# Altium PCB SDvp.PcbDoc
Units mil, origin at the board's own origin, x right, y up, seen from the top; angles counter-clockwise.
Board outline 3149.61 x 3937.01 mil, 2 copper layers (Top Layer, Bottom Layer); 108 components, 81 nets, 431 pads, 388 vias.
Unrouted connection lines stored in the file: 90.
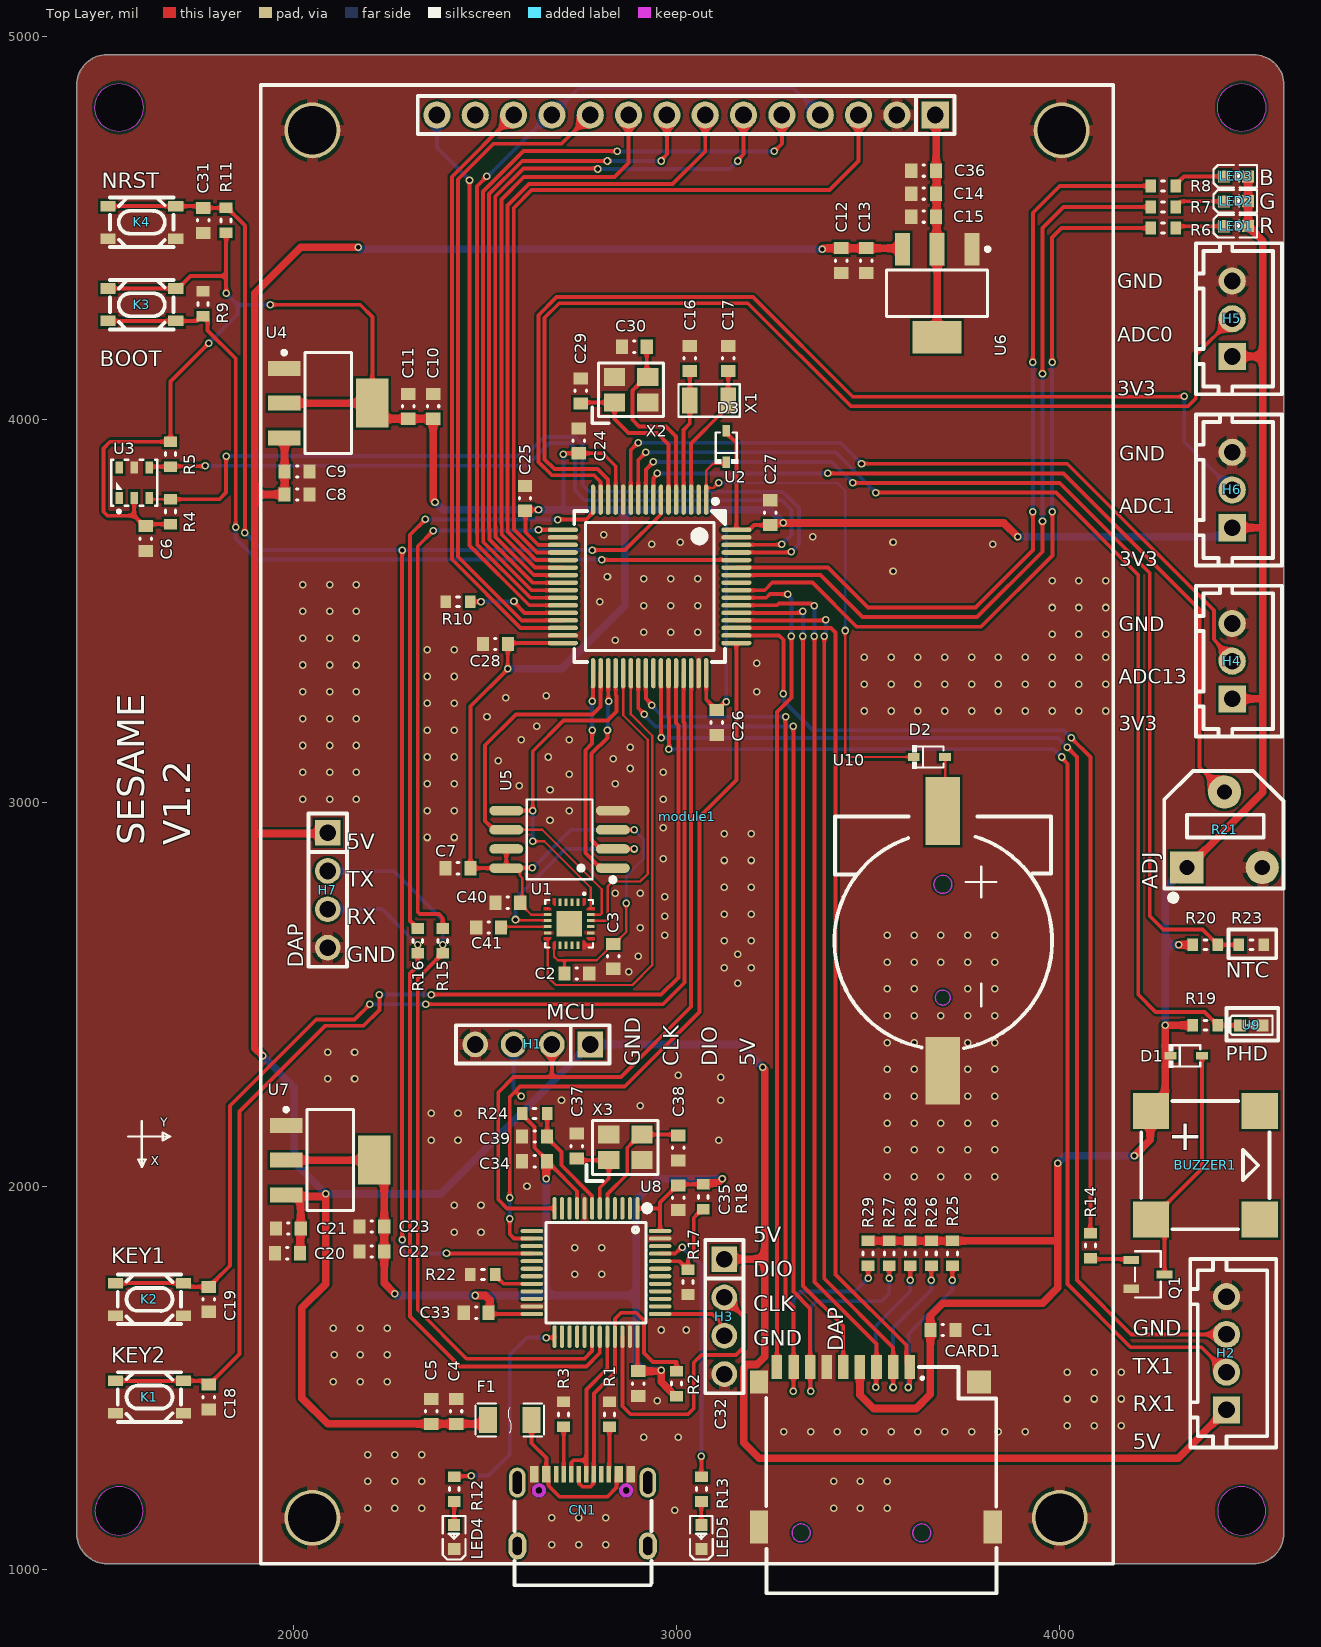
[diagram p0: Top Layer view]
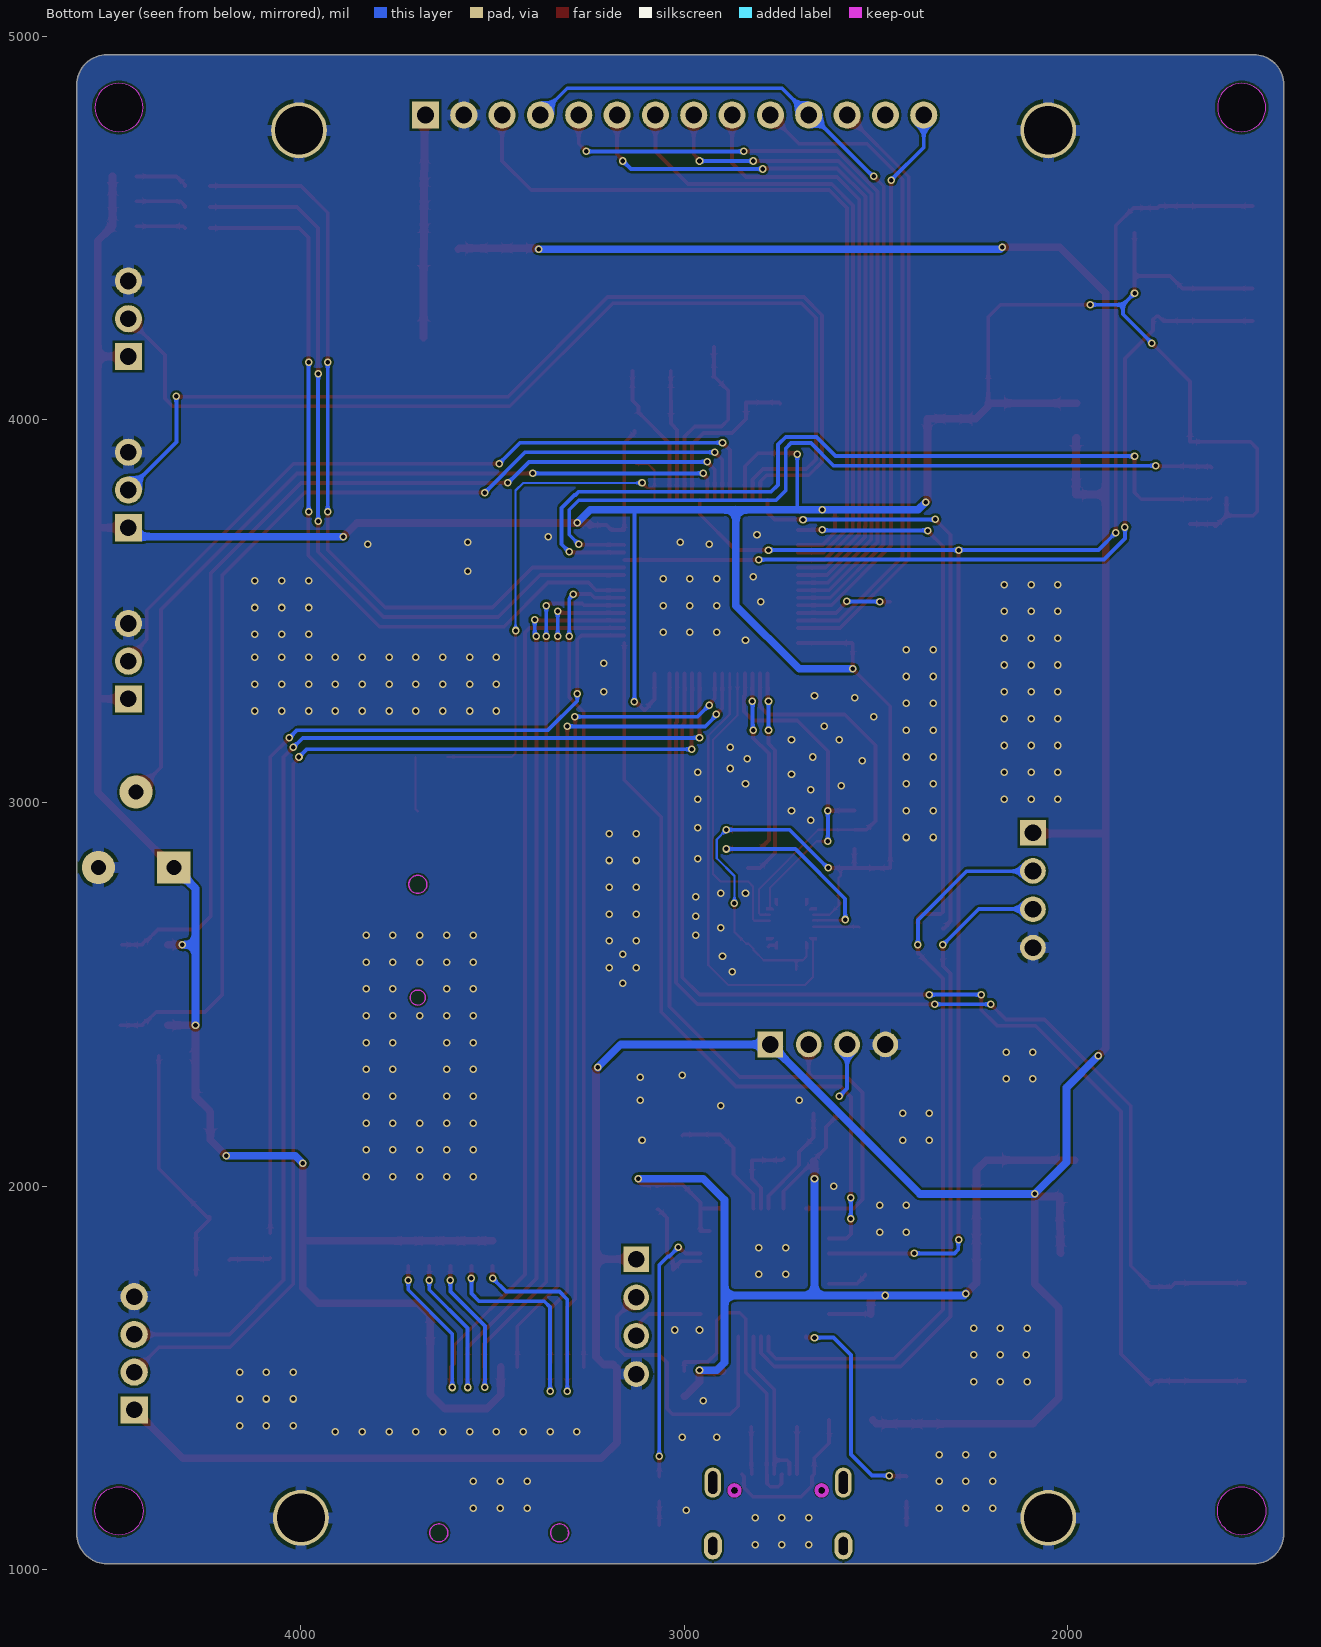
[diagram p1: Bottom Layer view, seen from below]

## Layer stack, top to bottom
Top Solder: solder mask 0.4, Solder Resist, Dk 3.5
Top Layer: signal copper 1.4
Dielectric 1: dielectric 12.6, FR-4, Dk 4.8
Bottom Layer: signal copper 1.4
Bottom Solder: solder mask 0.4, Solder Resist, Dk 3.5

## Board outline
1435.25,1093.99 ccw(c1513.99,1093.99) 1513.99,1015.25 4506.12,1015.25 ccw(c4506.12,1093.99) 4584.86,1093.99 4584.86,4873.52 ccw(c4506.12,4873.52) 4506.12,4952.26 1513.99,4952.26 ccw(c1513.99,4873.52) 1435.25,4873.52
cut-out: 4474.62,4751.47 cw(c4474.62,4814.46) 4411.63,4814.46 cw(c4474.62,4814.46) 4474.62,4877.45 cw(c4474.62,4814.46) 4537.61,4814.46 cw(c4474.62,4814.46)
cut-out: 4411.63,1153.05 ccw(c4474.62,1153.05) 4474.62,1090.05 ccw(c4474.62,1153.05) 4537.61,1153.05 ccw(c4474.62,1153.05) 4474.62,1216.04 ccw(c4474.62,1153.05)
cut-out: 1482.49,1153.05 ccw(c1545.49,1153.05) 1545.49,1090.05 ccw(c1545.49,1153.05) 1608.48,1153.05 ccw(c1545.49,1153.05) 1545.49,1216.04 ccw(c1545.49,1153.05)
cut-out: 1545.49,4751.47 cw(c1545.49,4814.46) 1482.49,4814.46 cw(c1545.49,4814.46) 1545.49,4877.45 cw(c1545.49,4814.46) 1608.48,4814.46 cw(c1545.49,4814.46)

## Design rules (kind name [scope] priority, off if disabled: settings)
Clearance [All] p1: gap=6 ignorepadtopadclearanceinfootprint=FALSE
HoleSize [All] p1: absolutevalues=TRUE maxlimit=1000 minlimit=1 maxpercent=80.000 minpercent=20.000
MinimumSolderMaskSliver [All] p1: minsoldermaskwidth=0.5
PlaneConnect [All] p1: planeconnectstyle=Direct reliefexpansion=20 reliefentries=4 reliefconductorwidth=15 reliefairgap=10
PolygonConnect [All] p1: thpad.connectstyle=Relief thpad.reliefconductorwidth=30 thpad.reliefentries=4 thpad.polygonreliefangle="90 Angle" thpad.airgapwidth=10 smdpad.connectstyle=Direct smdpad.reliefconductorwidth=30 smdpad.reliefentries=4 smdpad.polygonreliefangle="90 Angle" smdpad.airgapwidth=10 via.connectstyle=Direct via.reliefconductorwidth=30 via.reliefentries=4 via.polygonreliefangle="90 Angle" via.airgapwidth=10
RoutingVias [All] p1: holewidth=11.81 width=19.68 viastyle="Through Hole" minholewidth=11.81 minwidth=19.68 maxholewidth=1181.1 maxwidth=1968.5
SilkToSilkClearance [All] p1: silktosilkclearance=0
SilkToSolderMaskClearance [IsPad] p1: minsilkscreentomaskgap=0 clearancetoexposedcopper=TRUE
SolderMaskExpansion [All] p1: expansion=4 istentingtop=FALSE
Width [All] p1: maxlimit=1000 minlimit=6 preferedwidth=10
25 further rules are at their usual default settings.

## Components (designator, comment, footprint, x,y, rotation, side; value= is the part's Value field where it differs from the comment)
BUZZER1 "PassiveBuzzer" BUZ-SMD_8530 4380,2055 r270 top
C1 "100nf" CAP0603 3695,1625 r180 top
C2 "100nf" CAP0603 2740,2555 r0 top
C3 "10uf" CAP0603 2835,2600 r270 top
C4 "100nf" CAP0603 2425,1412.52 r270 top
C5 "10uf" CAP0603 2360,1412.48 r270 top
C6 "100nf" CAP0603 1615,3690 r270 top
C7 "100nf" CAP0603 2430,2830 r180 top
C8 "10uf" CAP0603 2010,3805 r180 top
C9 "100nf" CAP0603 2010,3865 r180 top
C10 "10uf" CAP0603 2365,4035 r270 top
C11 "100nf" CAP0603 2300,4035 r270 top
C12 "10uf" CAP0603 3430,4415 r90 top
C13 "100nf" CAP0603 3495,4415 r90 top
C14 "10uf" CAP0603 3645,4590 r0 top
C15 "100nf" CAP0603 3645,4530 r0 top
C16 "22pf" CAP0603 3035,4160 r270 top
C17 "22pf" CAP0603 3135,4160 r270 top
C18 "100nf" CAP0603 1780,1450 r270 top
C19 "100nf" CAP0603 1780,1705 r270 top
C20 "10uf" CAP0603 1985,1825 r0 top
C21 "100nf" CAP0603 1987.23,1889.74 r0 top
C22 "10uf" CAP0603 2205,1830 r0 top
C23 "100nf" CAP0603 2205,1895 r0 top
C24 "100nf" CAP0603 2745,3945 r270 top
C25 "100nf" CAP0603 2605,3795 r270 top
C26 "100nf" CAP0603 3105,3210 r90 top
C27 "100nf" CAP0603 3245,3757.48 r270 top
C28 "100nf" CAP0603 2527.52,3415 r0 top
C29 "22pf" CAP0603 2750,4075 r90 top
C30 "22pf" CAP0603 2890,4190 r0 top
C31 "100nf" CAP0603 1765,4520 r270 top
C32 "100nf" CAP0603 2900,1485 r90 top
C33 "100nf" CAP0603 2477.52,1670 r0 top
C34 "100nf" CAP0603 2630,2065 r0 top
C35 "100nf" CAP0603 3005,1970 r90 top
C36 "10uf" CAP0603 3645,4650 r0 top
C37 "22pf" CAP0603 2740,2105 r90 top
C38 "22pf" CAP0603 3005,2100 r90 top
C39 "100nf" CAP0603 2630,2130 r180 top
C40 "100nf" CAP0603 2560,2740 r180 top
C41 "100nf" CAP0603 2510,2675 r180 top
CARD1 "TFCard" TF-SMD 3520,1320 r0 top
CN1 "TypeC-16pin" USB-C-SMD_16Pin 2755,1155 r0 top
D1 "SchotkyDiode" SOD-323 4330,2340 r180 top
D2 "SchotkyDiode" SOD-323 3660,3120 r180 top
D3 "SchotkyDiode" SOD-323 3130,3930 r270 top
F1 "16V 1.5A" FUSE1206 2565,1390 r180 top
H1 "Head_4Pin" 2.54排针_4PIN 2625,2370 r180 top
H2 "Head_4Pin" XH2.54_4Pin 4435,1564.21 r90 top
H3 "Head_4Pin" 2.54排针_4PIN 3125,1660 r270 top
H4 "Head_3Pin" XH2.54_3Pin 4450,3370 r90 top
H5 "Head_3Pin" XH2.54_3Pin 4450,4263.43 r90 top
H6 "Head_3Pin" XH2.54_3Pin 4450,3816.71 r90 top
H7 "Head_4Pin" 2.54排针_4PIN 2090,2772.64 r270 top
K1 "SW" SW-SMD_3425 1625,1450 r180 top
K2 "SW" SW-SMD_3425 1625,1705 r180 top
K3 "SW" SW-SMD_3425 1605,4300 r0 top
K4 "SW" SW-SMD_3425 1605,4515 r0 top
LED1 "LED_R" LED0603 4460,4505 r0 top
LED2 "LED_G" LED0603 4460,4570 r0 top
LED3 "LED_B" LED0603 4460,4635 r0 top
LED4 "LED" LED0603 2420,1085 r90 top
LED5 "LED" LED0603 3065,1085 r90 top
module1 "LCD_3.5Inch" LCD_3.5Inch 3675,4795 r0 top locked
Q1 "NPN_SOT-23" SOT-23-3 4230,1770 r180 top
R1 "5.1k" RES0603 2825,1405 r90 top
R2 "1.5k" RES0603 3000,1485 r90 top
R3 "5.1k" RES0603 2705,1405 r90 top
R4 "10k" RES0603 1680,3760 r270 top
R5 "10k" RES0603 1680,3910 r90 top
R6 "1k" RES0603 4270,4500 r0 top
R7 "1.5k" RES0603 4270,4555 r180 top
R8 "1k" RES0603 4270,4610 r180 top
R9 "10k" RES0603 1765,4302.52 r90 top
R10 "10k" RES0603 2430,3525 r180 top
R11 "10k" RES0603 1825,4520 r90 top
R12 "2.7k" RES0603 2420,1210 r90 top
R13 "2.7k" RES0603 3065,1210 r90 top
R14 "470R" RES0603 4080,1845 r270 top
R15 "100R" RES0603 2390,2640 r90 top
R16 "100R" RES0603 2325,2640 r90 top
R17 "10k" RES0603 3030,1750 r90 top
R18 "NC" RES0603 3070,1972.48 r90 top
R19 "100k" RES0603 4380,2420 r180 top
R20 "100k" RES0603 4380,2630 r180 top
R21 "10k" RES-ADJ-BuleWhite 4430,2930 r0 top
R22 "10k" RES0603 2495,1770 r0 top
R23 "100k" RES0603 4500,2630 r180 top
R24 "10k" RES0603 2630,2190 r0 top
R25 "47k" RES0603 3720,1825 r270 top
R26 "47k" RES0603 3665,1825 r270 top
R27 "47k" RES0603 3555,1825 r270 top
R28 "47k" RES0603 3610,1825 r270 top
R29 "47k" RES0603 3500,1825 r270 top
U1 "MPU6500" QFN-24 2720,2685 r180 top
U2 "STM32F103RCT6" LQFP-64 2930,3565 r180 top
U3 "AHT20" AHT20 1585,3835.63 r270 top
U4 "AMS1117-3.3" SOT223 2091.48,4043.27 r0 top
U5 "W25Q64JVSSIQ" SOIC-8 2695,2905 r90 top
U6 "AMS1117-3.3" SOT223 3680,4329.84 r270 top
U7 "AMS1117-3.3" SOT223 2096.48,2068.27 r0 top
U8 "STM32F103C8T6" LQFP-48 2790,1775 r180 top
U9 "Photodiode" Photodiode0603 4500,2420 r180 top
U10 "CR-1220" BAT-SMD_CR1220 3695,2640 r270 top
X1 "32.768kHz" XTAL_3215 3085,4050 r0 top
X2 "8MHz" XTAL_3225 2838.39,4045 r0 top
X3 "8MHz" XTAL_3225 2823.39,2068.07 r0 top

## Footprints (in the part's own frame and the unit in brackets; to place one, negate y for a bottom-side part, rotate by r counter-clockwise, add the part's x,y. Pads: shape width x height; smd on the part's side, far side on the other; paste and mask are expansions set on the pad)
2.54排针_4PIN [mm]
  rect 1.7x1.7 hole 1.1 paste+0.051: 1(-3.81,0)
  round 1.7 hole 1.1 paste+0.051: 2(-1.27,0) 3(1.27,0) 4(3.81,0)
  silkscreen extent -5.08,-1.27 5.08,1.27, body extent -5.08,-1.33 5.08,1.33, height 8.54
AHT20 [mm]
  rect 0.8x0.5 smd paste+0 mask+0.05: 1(1,-1) 2(1,0) 3(1,1) 4(-1,1) 5(-1,0) 6(-1,-1)
  silkscreen extent -1.52,-1.52 2,1.52, body extent -1.5,-1.53 1.5,1.47, height 0.81
BAT-SMD_CR1220 [mm]
  rect 4.5x2.3 smd paste+0.051: 1(-8.6,0) 2(8.6,0)
  Keep-Out Layer circle w0.003: c3.75,0 r0.5
  Keep-Out Layer circle w0.003: c-3.75,0 r0.6
  Keep-Out Layer region: 4.25,0 4.201,-0.217 4.062,-0.391 3.861,-0.487 3.639,-0.487 3.438,-0.391 3.3,-0.217 3.25,0 3.25,0 3.3,0.217 3.438,0.391 3.639,0.487 3.861,0.487 4.062,0.391 4.201,0.217 4.25,0
  Keep-Out Layer region: 4.25,0 4.201,-0.217 4.062,-0.391 3.861,-0.487 3.639,-0.487 3.438,-0.391 3.3,-0.217 3.25,0 3.25,0 3.3,0.217 3.438,0.391 3.639,0.487 3.861,0.487 4.062,0.391 4.201,0.217 4.25,0
  Keep-Out Layer region: -3.15,0 -3.209,-0.26 -3.376,-0.469 -3.617,-0.585 -3.884,-0.585 -4.124,-0.469 -4.291,-0.26 -4.35,0 -4.35,0 -4.291,0.26 -4.124,0.469 -3.884,0.585 -3.617,0.585 -3.376,0.469 -3.209,0.26 -3.15,0
  Keep-Out Layer region: -3.15,0 -3.209,-0.26 -3.376,-0.469 -3.617,-0.585 -3.884,-0.585 -4.124,-0.469 -4.291,-0.26 -4.35,0 -4.35,0 -4.291,0.26 -4.124,0.469 -3.884,0.585 -3.617,0.585 -3.376,0.469 -3.209,0.26 -3.15,0
  silkscreen extent -8.24,-7.19 7.11,7.24, body extent -9.14,-7.45 9.46,7.45, height 4.1
BUZ-SMD_8530 [mil]
  rect 94.49x94.49 smd paste+2: 1(-141.72,-141.73) 2(141.72,-141.73) 3(141.71,141.72) 4(-141.72,141.73)
  silkscreen extent -167,-167 167,167, body extent -171,-171 171,171, height 119
CAP0603 [mm] "Chip Capacitor, 2-Leads, Body 1.60x0.80mm, IPC Medium Density"
  rect 0.8x0.95 smd: 1(-0.825,0) 2(0.825,0)
  silkscreen extent -0.05,-0.38 0.05,0.38, body extent -0.8,-0.4 0.8,0.4, height 0.8
FUSE1206 [mil] "Chip Resistor, 2-Leads, Body 3.10x1.55mm, IPC Medium Density"
  rect 46.85x68.03 smd paste+2: 1(-56.78,0) 2(57,0)
  silkscreen extent -89,-43 89,43, body extent -63,-33 63,33, height 24
LCD_3.5Inch [mm]
  rect 1.8x1.8 hole 1.1 paste+0.051: 1(0,0)
  round 3.7 hole 3.2: 2(-41.275,-92.964) 2(-41.275,-1.016) 2(8.255,-92.964) 2(8.382,-1.016)
  round 1.8 hole 1.1 paste+0.051: 2(-2.54,0) 3(-5.08,0) 4(-7.62,0) 5(-10.16,0) 6(-12.7,0) 7(-15.24,0) 8(-17.78,0) 9(-20.32,0) 10(-22.86,0) 11(-25.4,0) 12(-27.94,0) 13(-30.48,0) 14(-33.02,0)
  silkscreen extent -44.7,-96.01 11.8,1.99, body extent -44.75,-95.99 11.75,2.01, height 15.4
LED0603 [mm]
  rect 0.8x0.8 smd: 1(-0.8,-0.003) 2(0.8,0.003)
  silkscreen extent -1.49,-0.75 1.39,0.76, body extent -0.81,-0.41 0.81,0.41, height 0.56
LQFP-48 [mm]
  oval 0.27x1.5 smd paste+0 mask+0.05: 1(-2.75,-4.25) 2(-2.25,-4.25) 3(-1.75,-4.25) 4(-1.25,-4.25) 5(-0.75,-4.25) 6(-0.25,-4.25) 7(0.25,-4.25) 8(0.75,-4.25) 9(1.25,-4.25) 10(1.75,-4.25) 11(2.25,-4.25) 12(2.75,-4.25) 25(2.75,4.25) 26(2.25,4.25) 27(1.75,4.25) 28(1.25,4.25) 29(0.75,4.25) 30(0.25,4.25) 31(-0.25,4.25) 32(-0.75,4.25) 33(-1.25,4.25) 34(-1.75,4.25) 35(-2.25,4.25) 36(-2.75,4.25)
  oval 1.5x0.27 smd paste+0 mask+0.05: 13(4.25,-2.75) 14(4.25,-2.25) 15(4.25,-1.75) 16(4.25,-1.25) 17(4.25,-0.75) 18(4.25,-0.25) 19(4.25,0.25) 20(4.25,0.75) 21(4.25,1.25) 22(4.25,1.75) 23(4.25,2.25) 24(4.25,2.75) 37(-4.25,2.75) 38(-4.25,2.25) 39(-4.25,1.75) 40(-4.25,1.25) 41(-4.25,0.75) 42(-4.25,0.25) 43(-4.25,-0.25) 44(-4.25,-0.75) 45(-4.25,-1.25) 46(-4.25,-1.75) 47(-4.25,-2.25) 48(-4.25,-2.75)
  silkscreen extent -3.59,-4.46 3.3,3.34, body extent -4.5,-4.5 4.5,4.5, height 1.45
LQFP-64 [mm]
  oval 0.3x2 smd paste+0.051: 1(-3.75,-5.75) 2(-3.25,-5.75) 3(-2.75,-5.75) 4(-2.25,-5.75) 5(-1.75,-5.75) 6(-1.25,-5.75) 7(-0.75,-5.75) 8(-0.25,-5.75) 9(0.25,-5.75) 10(0.75,-5.75) 11(1.25,-5.75) 12(1.75,-5.75) 13(2.25,-5.75) 14(2.75,-5.75) 15(3.25,-5.75) 16(3.75,-5.75) 33(3.75,5.75) 34(3.25,5.75) 35(2.75,5.75) 36(2.25,5.75) 37(1.75,5.75) 38(1.25,5.75) 39(0.75,5.75) 40(0.25,5.75) 41(-0.25,5.75) 42(-0.75,5.75) 43(-1.25,5.75) 44(-1.75,5.75) 45(-2.25,5.75) 46(-2.75,5.75) 47(-3.25,5.75) 48(-3.75,5.75)
  oval 2x0.3 smd paste+0.051: 17(5.75,-3.75) 18(5.75,-3.25) 19(5.75,-2.75) 20(5.75,-2.25) 21(5.75,-1.75) 22(5.75,-1.25) 23(5.75,-0.75) 24(5.75,-0.25) 25(5.75,0.25) 26(5.75,0.75) 27(5.75,1.25) 28(5.75,1.75) 29(5.75,2.25) 30(5.75,2.75) 31(5.75,3.25) 32(5.75,3.75) 49(-5.75,3.75) 50(-5.75,3.25) 51(-5.75,2.75) 52(-5.75,2.25) 53(-5.75,1.75) 54(-5.75,1.25) 55(-5.75,0.75) 56(-5.75,0.25) 57(-5.75,-0.25) 58(-5.75,-0.75) 59(-5.75,-1.25) 60(-5.75,-1.75) 61(-5.75,-2.25) 62(-5.75,-2.75) 63(-5.75,-3.25) 64(-5.75,-3.75)
  silkscreen extent -5,-5.79 5,5, body extent -5.99,-5.99 6.01,6.01, height 1.45
Photodiode0603 [mm]
  rect 0.8x0.8 smd paste+0 mask+0.05: 1(-0.75,0) 2(0.75,0)
  silkscreen extent -1.4,-0.64 1.52,0.64, body extent -0.8,-0.4 0.8,0.4, height 0.8
QFN-24 [mm]
  round 0.04 smd: 1(-1,-1.427) 6(1,-1.427) 7(1.427,-1) 12(1.427,1) 13(1,1.427) 18(-1,1.427) 19(-1.427,1) 24(-1.427,-1)
  rect 0.2x0.505 smd paste-100 mask+0.051: 2(-0.6,-1.427) 3(-0.2,-1.427) 4(0.2,-1.427) 5(0.6,-1.427) 14(0.6,1.427) 15(0.2,1.427) 16(-0.2,1.427) 17(-0.6,1.427)
  rect 0.505x0.2 smd paste-100 mask+0.051: 8(1.427,-0.6) 9(1.427,-0.2) 10(1.427,0.2) 11(1.427,0.6) 20(-1.427,0.6) 21(-1.427,0.2) 22(-1.427,-0.2) 23(-1.427,-0.6)
  rect 1.7x1.7 smd paste-100 mask+0.051: 25(0,0)
  Top Layer region: -1.68,1.1 -1.274,1.1 -1.174,1 -1.175,0.9 -1.68,0.9 -1.68,1.1
  Top Layer region: 1.1,-1.68 0.9,-1.68 0.9,-1.175 1,-1.175 1.1,-1.275 1.1,-1.68
  Top Layer region: -1.1,-1.68 -0.9,-1.68 -0.9,-1.175 -1,-1.174 -1.1,-1.275 -1.1,-1.68
  Top Layer region: 1.1,1.68 0.9,1.68 0.9,1.175 1,1.174 1.1,1.274 1.1,1.68
  Top Layer region: 1.68,1.1 1.274,1.1 1.174,1 1.175,0.9 1.68,0.9 1.68,1.1
  Top Layer region: 1.68,-1.1 1.275,-1.1 1.175,-1 1.175,-0.9 1.68,-0.9 1.68,-1.1
  Top Layer region: -1.68,-1.1 -1.274,-1.1 -1.174,-1 -1.175,-0.9 -1.68,-0.9 -1.68,-1.1
  Top Layer region: -1.1,1.68 -0.9,1.68 -0.9,1.175 -1,1.174 -1.1,1.274 -1.1,1.68
  silkscreen extent -1.58,-2.05 1.58,1.58, body extent -1.5,-1.5 1.5,1.5, height 0.9
RES0603 [mm] "Chip Resistor, 2-Leads, Body 1.60x0.80mm, IPC Medium Density"
  rect 0.7x0.85 smd: 1(-0.825,0) 2(0.825,0)
  silkscreen extent -0.1,-0.33 0.1,0.33, body extent -0.8,-0.4 0.8,0.4, height 0.45
RES-ADJ-BuleWhite [mm]
  rect 2.2x2.1 hole 1 paste+0 mask+0.05: 1(-2.5,-2.5)
  round 2.2 hole 1 paste+0 mask+0.05: 2(0,2.5) 3(2.5,-2.5)
  silkscreen extent -4,-4.7 3.9,3.9, body extent -3.25,-3.7 3.25,3.5, height 7.7
SOD-323 [mm]
  rect 0.78x0.5 smd paste+0.051: 1(-1.04,0) 2(1.04,0)
  silkscreen extent -0.93,-0.78 1.15,0.78, body extent -1.25,-0.62 1.25,0.63, height 0.95
SOIC-8 [mm]
  oval 0.63x2.25 smd paste+0.051: 1(-1.905,-3.53) 2(-0.635,-3.53) 3(0.635,-3.53) 4(1.905,-3.53) 5(1.905,3.53) 6(0.635,3.53) 7(-0.635,3.53) 8(-1.905,3.53)
  silkscreen extent -2.82,-3.68 2.64,2.18, body extent -2.63,-3.89 2.67,4.01, height 2.07
SOT223 [mm]
  rect 2.15x1 smd: 1(-2.925,2.3) 2(-2.925,0) 3(-2.925,-2.3)
  rect 2.15x3.25 smd: 2(2.925,0)
  silkscreen extent -3.05,-3.35 1.55,3.47, body extent -3.55,-3.25 3.56,3.25, height 1.75
SOT-23-3 [mil]
  rect 40.85x20.95 smd paste+2: 1(43.36,-37.4) 2(43.36,37.4) 3(-43.36,0)
  silkscreen extent -34,-60 34,60, body extent -55,-57 55,57, height 43
SW-SMD_3425 [mm]
  rect 1x0.7 smd: 1(-2.25,1.075) 1(2.25,1.075) 2(-2.25,-1.075) 2(2.25,-1.075)
  silkscreen extent -2.1,-1.65 2.1,1.65, body extent -2.6,-1.62 2.6,1.63, height 2.5
TF-SMD [mm]
  rect 0.7x1.6 smd paste+0.051: 1(2.25,5.3) 2(1.15,5.3) 3(0.05,5.3) 4(-1.05,5.3) 5(-2.15,5.3) 6(-3.25,5.3) 7(-4.35,5.3) 8(-5.45,5.3) CD(-6.55,5.3)
  rect 1.2x1.5 smd paste+0.051: 10(-7.75,4.3)
  rect 1.2x2.2 smd paste+0.051: 11(-7.75,-5.3) 12(7.75,-5.3)
  rect 1.6x1.5 smd paste+0.051: 13(6.85,4.3)
  Keep-Out Layer circle w0.003: c-4.95,-5.7 r0.6
  Keep-Out Layer circle w0.003: c3.05,-5.7 r0.6
  Keep-Out Layer region: -4.35,-5.7 -4.409,-5.96 -4.576,-6.169 -4.816,-6.285 -5.083,-6.285 -5.324,-6.169 -5.491,-5.96 -5.55,-5.7 -5.55,-5.7 -5.491,-5.44 -5.324,-5.231 -5.083,-5.115 -4.816,-5.115 -4.576,-5.231 -4.409,-5.44 -4.35,-5.7
  Keep-Out Layer region: -4.35,-5.7 -4.409,-5.96 -4.576,-6.169 -4.816,-6.285 -5.083,-6.285 -5.324,-6.169 -5.491,-5.96 -5.55,-5.7 -5.55,-5.7 -5.491,-5.44 -5.324,-5.231 -5.083,-5.115 -4.816,-5.115 -4.576,-5.231 -4.409,-5.44 -4.35,-5.7
  Keep-Out Layer region: 3.65,-5.7 3.591,-5.96 3.424,-6.169 3.184,-6.285 2.917,-6.285 2.676,-6.169 2.509,-5.96 2.45,-5.7 2.45,-5.7 2.509,-5.44 2.676,-5.231 2.917,-5.115 3.184,-5.115 3.424,-5.231 3.591,-5.44 3.65,-5.7
  Keep-Out Layer region: 3.65,-5.7 3.591,-5.96 3.424,-6.169 3.184,-6.285 2.917,-6.285 2.676,-6.169 2.509,-5.96 2.45,-5.7 2.45,-5.7 2.509,-5.44 2.676,-5.231 2.917,-5.115 3.184,-5.115 3.424,-5.231 3.591,-5.44 3.65,-5.7
  silkscreen extent -7.26,-9.7 8,5.3, body extent -8.08,-9.69 8.07,5.51, height 2.05
USB-C-SMD_16Pin [mm]
  rect 0.55x1.1 smd paste-100 mask+0.05: 1(-3.2,2.375) 2(-2.4,2.375) 11(2.4,2.375) 12(3.2,2.375)
  rect 0.3x1.1 smd paste-100 mask+0.05: 3(-1.75,2.375) 4(-1.25,2.375) 5(-0.75,2.375) 6(-0.25,2.375) 7(0.25,2.375) 8(0.75,2.375) 9(1.25,2.375) 10(1.75,2.375)
  oval 1.1x2 hole 0.6 slot 1.5 at 90 deg paste+0 mask+0.05: 13(-4.325,1.825) 14(4.325,1.825)
  oval 1.2x1.8 hole 0.6 slot 1.2 at 90 deg paste+0 mask+0.05: 13(-4.325,-2.375) 14(4.325,-2.375)
  Keep-Out Layer board cut-out: 3.24,1.305 3.191,1.477 3.063,1.603 2.89,1.649 2.717,1.603 2.589,1.477 2.54,1.305 2.54,1.305 2.589,1.133 2.717,1.007 2.89,0.961 3.063,1.007 3.191,1.133 3.24,1.305
  Keep-Out Layer board cut-out: -2.54,1.305 -2.589,1.477 -2.717,1.603 -2.89,1.649 -3.063,1.603 -3.191,1.477 -3.24,1.305 -3.24,1.305 -3.191,1.133 -3.063,1.007 -2.89,0.961 -2.717,1.007 -2.589,1.133 -2.54,1.305
  Multi-Layer keep-out circle w0.254: c2.89,1.305 r0.35
  Multi-Layer keep-out circle w0.254: c-2.89,1.305 r0.35
  silkscreen extent -4.5,-4.97 4.57,0.6, body extent -4.45,-4.99 4.49,2.59, height 3.26
XH2.54_3Pin [mm]
  rect 1.8x1.8 hole 1.1 paste+0 mask+0.05: 1(-2.5,0)
  round 1.8 hole 1.1: 2(0,0) 3(2.5,0)
  silkscreen extent -5,-3.3 5,2.4, body extent -5,-3.3 5,2.4, height 7
XH2.54_4Pin [mm]
  rect 1.8x1.8 hole 1.1: 1(-3.75,0)
  round 1.8 hole 1.1: 2(-1.25,0) 3(1.25,0) 4(3.75,0)
  silkscreen extent -6.25,-3.3 6.25,2.4, body extent -6.25,-3.31 6.25,2.39, height 7
XTAL_3215 [mm]
  rect 1.05x1.7 smd paste+0.051: 1(-1.275,0) 2(1.275,0)
  silkscreen extent -2.03,-1.08 2.03,1.08, body extent -1.57,-0.76 1.63,0.74, height 0.91
XTAL_3225 [mm]
  rect 1.4x1.2 smd: 1(0,0) 2(2.2,0) 3(2.2,1.7) 4(0,1.7)
  silkscreen extent -1.47,-1.37 3.25,2.62, body extent -0.46,-0.37 2.74,2.13, height 0.81

## Part data
C1 C2 C3 C4 C5 C6 C7 C8 C9 C10 C11 C12 C13 C14 C15 C16 C17 C18 C19 C20 C21 C22 C23 C24 C25 C26 C27 C28 C29 C30 C31 C32 C33 C34 C35 C36 C37 C38 C39 C40 C41: library part Cap, "MLCC无极性电容"
D1 D2 D3: "肖特基二极管"
F1: library part Fuse, "保险丝"
K1 K2 K3 K4: "轻触开关"
LED1 LED2 LED3: library part LED, "发光二极管"
LED4 LED5: "发光二极管"
Q1: "三极管"
R1 R2 R3 R4 R5 R6 R7 R8 R9 R10 R11 R12 R13 R14 R15 R16 R17 R18 R19 R20 R22 R24 R25 R26 R27 R28 R29: library part Res, "电阻"
R21: library part RES_ADJ, "可调电位器", Symbol=RM065-103(10K)
R23: library part RES_NTC, "热敏电阻"
U1: "陀螺仪芯片", Symbol=MPU6500
U2 U8: "STM32F103"
  U2: Symbol=STM32F103RCT6
  U8: Symbol=STM32F103C8T6
U3: "温湿度芯片", Symbol=AHT20_C2757850
U4 U6 U7: "降压芯片"
U5: "FLASH芯片", Symbol=W25Q64JVSSIQ_C179171
U9: "光敏二极管", Symbol=XYC-PT0603AC-LB1-S
U10: "CR-1220电池座", Symbol=XDCR-1220-006
X1: library part XTAL_3215, "无源晶振3215", Symbol=XKXGI-SUA-32.768K
X2 X3: library part XTAL_无源4脚
BUZZER1: Symbol=MLT-8530
CARD1: Symbol="TF PUSH"

## Via types
v1: diameter 19.68, hole 11.81, Top Layer to Bottom Layer, 388 vias

## Nets (pads, with @x,y where several pads share a name; then routed paths per layer and width w, separated by ;. In a path a pad name is that pad's centre, name@x,y a point inside that pad or via, vN(x,y) a via of type N, cw(c..) or ccw(c..) an arc to the next point about the centre after c; other vN are vias at no path point)
3V3: BUZZER1.1 C1.2 C2.1 C3.1 C6.1 C7.1 C10.2 C11.2 C24.2 C25.2 C26.2 C27.2 C28.2 C40.1 CARD1.4 D1.2 D3.1 H4.1 H5.1 H6.1 K3.1 LED1.2 LED2.2 LED3.2 R4.2 R5.2 R11.1 R19.2 R20.2 R21.1 R25.1 R26.1 R27.1 R28.1 R29.1 U1.8 U1.13 U2.13 U2.19 U2.32 U2.48 U2.64 U3.2 U4.2 U5.3 U5.7 U5.8 | length 14256.4
  Top Layer w6: U5.8 2582.82,2830 2591.51,2821.31 2591.51,2810.1 2597.48,2804.13 C40.1@2597.48,2732.05 ; C40.1 2592.48,2737.05 C40.1@2597.48,2732.05 ; U1.8 2620.91,2708.62 2605.23,2724.3 2603.5,2726.02 C40.1@2597.48,2732.05 ; U1.13 2680.63,2599.37 2690.3,2589.7 2707.52,2589.7 ; C2.1@2707.52,2565 2707.52,2589.7 ; v1(2868.77,2738.82) 2868.77,2663.29 2837.95,2632.48 2832.05,2632.48 2819.3,2619.73 2819.3,2616.78 2792.22,2589.7 2707.52,2589.7
  Top Layer w10: K3.1@1516.41,4342.32 1693.59,4342.32 1699.49,4342.32 1732.17,4375 1825,4375 ; U3.2 1585,3749.53 ; C6.1@1609.42,3727.95 1609.86,3727.52 R4.2 ; C6.1 1612.05,3722.48 1585,3749.53 ; v1(1780,4200) 1680,4100 R5.2 1522.48,3942.48 1505,3925 1505,3760 1515.47,3749.53 1585,3749.53 ; v1(1825,4330) 1825,4375 ; R11.1 1825,4375 ; v1(1940,4300) 2175,4300 2206.64,4268.36 U4.2@2206.64,4043.27 ; C7.1 2462.48,3252.48 v1(2560,3350) C28.2 2562.36,3417.36 U2.32 ; C7.1@2467.52,2830 U5.8 ; U5.7 U5.8 ; v1(2624.18,2830.82) 2623.76,2830.41 2556.43,2830.41 U5.8 ; v1(2640,3765) 2607.48,3765 C25.2 2606.31,3761.21 2606.31,3706.31 2639.36,3673.27 U2.19 ; v1(2705,3910) 2707.52,3912.52 C24.2 2807.48,3912.52 2841.42,3878.58 U2.13 ; U5.3 v1(2890,2930) ; U2.48 3077.64,3269.84 3091.3,3256.18 3091.3,3253.23 3102.05,3242.48 C26.2 3126.75,3264.23 v1(3129.7,3264.23) ; D3.1 3130,3965.43 3156.37,3939.06 U2.64 3190.32,3712.64 3202.68,3725 C27.2
  Top Layer w20: U4.2@1976.32,4043.27 2206.64,4043.27 2206.64,4034.84 2238.96,4002.52 C11.2 C10.2 2365,3790 v1(2370,3785) ; C27.2 3250.75,3730.75 3278.91,3730.75 v1(3279,3730.84) ; v1@3280.43,3730.43 3854.57,3730.43 v1(3890,3695) ; CARD1.4 3478.66,1456.34 3515,1420 3625,1420 3662.52,1457.52 C1.2 3662.52,1662.52 3695,1695 3955,1695 3995,1735 3995,1860 ; R29.1 R27.1 R28.1 R26.1 R25.1 3992.48,1857.48 3995,1860 ; v1(3995,2060) 3995,1860 ; v1(4195,2080) 4236.2,2121.2 4236.2,2194.65 BUZZER1.1 4275,2233.45 v1(4275,2420) R19.2 ; v1(4310,2630) R20.2 ; R21.1 4333.54,2831.57 4530,3028.03 4530,3265 ; H4.1 4523.43,3271.57 4530,3265 ; H6.1 4528.29,3718.29 4530,3720 ; H5.1 4530,4165 ; LED3.2 LED2.2 LED1.2 4530,4466.61 4530,4165 ; 4530,3265 4530,3720 ; 4530,3720 4530,4165
  Bottom Layer w6: v1(2868.77,2738.82) 2868.77,2809.3 2915,2855.54 2915,2905 v1(2890,2930)
  Bottom Layer w10: v1(1780,4200) 1855,4275 1855,4300 ; v1(1825,4330) 1855,4300 ; v1(1940,4300) 1855,4300 ; v1@2626.85,2831.85 2725,2930 v1(2890,2930) ; 2700,3765 2705,3770 v1(2705,3910) ; v1(3129.7,3264.23) 3129.7,3764.7 3130,3765
  Bottom Layer w20: v1(2370,3785) 2390,3765 2700,3765 2865,3765 ; v1(2560,3350) 2700,3350 2865,3515 2865,3765 ; v1(3279,3730.84) 3279,3731 3245,3765 3130,3765 2865,3765 ; v1(3890,3695) 4426.71,3695 H6.1 ; v1(3995,2060) 4015,2080 v1(4195,2080) ; v1(4275,2420) 4275,2630 ; v1(4310,2630) 4275,2630 ; R21.1 4329.61,2831.57 4275,2776.97 4275,2630
3V3_DAP: C22.2 C23.2 C32.2 C33.2 C34.2 C35.2 R2.1 R18.2 R24.1 U7.2 U8.1 U8.9 U8.24 U8.36 U8.48 | length 3430.9
  Top Layer w10: C33.2@2513.27,1666.73 U8.24 ; R24.1@2597.52,2187.05 2630,2154.57 2630,2100.43 C34.2@2662.48,2067.95 ; C34.2 2662.48,2062.05 2673.23,2051.3 2676.18,2051.3 2740.67,1986.81 2740.67,1942.44 U8.9 ; U8.36 2898.27,1519.21 C32.2 ; U8.1@2898.27,1918.11 U8.1 2955,1942.32 2957.32,1940 ; U8.48@2933.11,1883.27 U8.48 2957.32,1940 ; R18.2 3004.53,2004.96 2957.32,1957.75 2957.32,1940
  Top Layer w20: U7.2@1981.32,2068.27 2211.64,2068.27 2237.48,2042.43 C23.2 2237.48,1747.52 v1(2265,1720) ; v1(2475,1715) 2501.55,1715 2513.27,1703.28 C33.2@2513.27,1666.73 ; v1(2660,2020) 2660,2062.52 C34.2 ; C32.2 2957.48,1517.48 v1(2960,1520) 2960,1489.57 2977.27,1472.3 2997.05,1452.52 R2.1 ; R18.2 3073.78,2008.74 3108.74,2008.74 v1(3120,2020)
  Bottom Layer w20: v1(2265,1720) 2270,1715 2660,1715 ; v1(2660,2020) 2660,1715 ; v1(2960,1520) 2915,1520 2895,1540 2895,1715 ; v1(3120,2020) 2950,2020 2895,1965 2895,1715 ; 2660,1715 2895,1715
3V3_LCD: C14.2 C15.2 C36.2 module1.1 U6.2 | length 582.4
  Top Layer w20: module1.1 3677.48,4792.52 C36.2 3678.74,4648.74 3678.74,4446.26 3680,4445 U6.2@3680,4214.69
5V: C4.2 C5.2 C8.2 C9.2 C12.2 C13.2 C20.2 C21.2 F1.2 H1.1 H2.1 H3.1 H7.1 U4.3 U6.3 U7.3 | length 9659.6
  Top Layer w20: v1(1920,2340) 1900,2360 1900,2925 ; U4.3 1977.52,3951.52 C9.2 C8.2 1900,3805 ; C20.2 2018.59,1826.11 2018.59,1888.63 C21.2 2019.71,1973.28 2078.28,1973.28 v1(2085,1980) 2085,1745 2022.5,1682.5 2022.5,1447.5 2090,1380 C5.2 2498,1380 F1.2 ; H7.1@2090,2920.28 1904.72,2920.28 1900,2925 ; v1(2170,4450) 2020,4450 1900,4330 1900,3805 ; H3.1 3230,1810 ; v1(3225,2310) 3230,2305 3230,1810 ; v1(3380,4445) 3382.48,4447.48 C12.2 C13.2 3586.97,4447.48 U6.3 ; H2.1 4308.65,1290.23 3216.27,1290.23 3175.26,1331.24 3175.26,1525.44 3184.63,1534.82 3209.82,1534.82 3230,1555 3230,1810 ; 1900,2925 1900,3805
  Bottom Layer w20: v1(1920,2340) 2002.5,2257.5 2002.5,2062.5 v1(2085,1980) 2385,1980 H1.1 3165,2370 v1(3225,2310) ; v1(2170,4450) 2175,4445 v1(3380,4445)
ADC_0: H5.2 U2.14 | length 2691.3
  Top Layer w10: U2.14 2821.38,3791.72 2821.38,3843.62 2794,3871 2681.63,3871 2656,3896.63 2656,4266 2694,4304 3186,4304 3455,4035 4335,4035 4355,4055 4355,4168.43 H5.2
ADC_1: H6.2 U2.15 | length 2721.4
  Top Layer w10: U2.15 2801.7,3791.72 2801.7,3838.3 2785,3855 2675,3855 2640,3890 2640,4200 2640,4272.63 2687.37,4320 2760,4320 3200,4320 3460,4060 4324.16,4060 v1(4325,4060.84)
  Bottom Layer w10: v1(4325,4060.84) 4325,3941.71 H6.2
ADC_13: H4.2 U2.11 | length 1989.9
  Top Layer w10: U2.11 2880.79,3920.79 v1(2900,3940) ; v1(3482.74,3885.24) 4019.76,3885.24 4402.21,3502.79 4402.21,3427.69 H4.2
  Bottom Layer w10: v1(2900,3940) 3427.99,3940 v1(3482.74,3885.24)
BEEP: R14.1 U2.50 | length 2391.2
  Top Layer w10: U2.50 3267.95,3437.05 3279.16,3425.84 v1(3279.16,3285) ; v1(4030,3170) 4080,3120 R14.1
  Bottom Layer w10: v1(3279.16,3285) 3279.16,3265.84 3355,3190 4010,3190 v1(4030,3170)
BOOT0: K3.2 R9.1 U2.60 | length 2200.4
  Top Layer w10: K3.2@1516.41,4257.68 1693.59,4257.68 1749.68,4257.68 1762.05,4270.04 1767.95,4270.04 1776.73,4261.26 1776.73,4232.74 1850,4159.48 v1(1850,3720) ; v1(2805,3635) 2805.75,3634.25 3156.02,3634.25 U2.60
  Bottom Layer w10: v1(1850,3720) 1849.84,3719.84 1849.84,3690.16 1905,3635 v1(2805,3635)
BOOT1: R10.1 U2.28 | length 255.2
  Top Layer w10: R10.1 v1(2490,3525) ; v1(2576.05,3526.05) 2576.05,3523.95 2603.9,3496.1 U2.28
  Bottom Layer w10: v1(2490,3525) 2490.53,3525.53 2575.53,3525.53 v1(2576.05,3526.05)
DAP_BOOT0: R17.2 R18.1 U8.44 | length 259.4
  Top Layer w10: U8.44 2957.44,1804.41 3008.07,1804.41 3018.27,1794.21 3018.27,1791.26 3027.05,1782.48 R17.2 3030,1810.52 3045,1825.52 3045,1917.95 3067.05,1940 R18.1
DAP_BOOT1: R22.2 U8.20 | length 107.1
  Top Layer w10: R22.2 2527.48,1767.05 2549.06,1745.47 U8.20
DAP_CLK: H3.3 U8.37 | length 205.8
  Top Layer w10: U8.37 3093.27,1666.73 3114.11,1645.89 3114.11,1620.89 H3.3
DAP_DIO: H3.2 U8.34 | length 799.9
  Top Layer w10: U8.34 2858.9,1426.1 2880,1405 3030,1405 3045,1420 3045,1540 3065,1560 3155,1560 3175,1580 3175,1660 H3.2
DAP_LED1: R12.2 U8.25 | length 566.7
  Top Layer w10: R12.2 2421.26,1243.74 2463.74,1243.74 v1(2465,1245) ; v1(2660,1605) 2681.44,1605 2681.73,1605.29 U8.25
  Bottom Layer w10: v1(2465,1245) 2510,1245 2565,1300 2565,1560 2610,1605 v1(2660,1605)
DAP_LED2: R13.2 U8.45 | length 686.3
  Top Layer w10: U8.45 2957.44,1824.33 2996.69,1824.33 3013.51,1841.15 v1(3015,1841.15) ; R13.2 v1(3065,1295)
  Bottom Layer w10: v1(3015,1841.15) 3039,1817.15 3042.85,1817.15 3065,1795 v1(3065,1295)
DAP_NRST: C39.1 R24.2 U8.7 | length 296.4
  Top Layer w10: R24.2 C39.1 2662.48,2127.05 2700,2089.53 2700,2055 2780.04,1974.96 2780.04,1942.44 U8.7
DAP_OSC_IN: C38.2 U8.5 X3.3 | length 328.5
  Top Layer w10: U8.5 2819.65,1942.44 2819.65,1979.65 2871.44,2031.44 2871.44,2100.38 2906.06,2135 X3.3 3002.48,2135 C38.2
DAP_OSC_OUT: C37.1 U8.6 X3.1 | length 220.7
  Top Layer w10: C37.1 2744.45,2068.07 X3.1 2823.39,2019.85 2799.84,1996.3 U8.6
DAP_RX: H7.3 R16.1 U8.31 | length 1857.9
  Top Layer w10: v1(2325,2630) R16.1 2325,2575 2305,2555 2305,1660 2435,1530 2765,1530 2799.84,1564.84 U8.31
  Bottom Layer w10: H7.3@2090,2723.43 2231.57,2723.43 v1(2325,2630)
DAP_TX: H7.2 R15.1 U8.30 | length 1952.5
  Top Layer w10: v1(2390,2630) R15.1 2387.05,2607.52 2378.27,2598.74 2378.27,2595.79 2325,2542.52 2325,1677.63 2452.63,1550 2760,1550 2780.04,1570.04 2780.04,1607.56 U8.30
  Bottom Layer w10: H7.2@2090,2821.85 2263.15,2821.85 2390,2695 v1(2390,2630)
DM: CN1.5 CN1.7 U8.32 | length 454.3
  Top Layer w10: CN1.5 2725.47,1279.14 2731.33,1285 2764.84,1285 ; CN1.7 2764.84,1285 ; U8.32 2819.53,1524.53 2764.84,1469.85 2764.84,1285
DP: CN1.6 CN1.8 R2.2 U8.33 | length 816.4
  Top Layer w10: CN1.6 2746.06,1247.6 2746.06,1224.17 2754.38,1215.85 2775.31,1215.85 2783.62,1224.16 2783.62,1247.6 CN1.8 2784.53,1459.53 2839.21,1514.21 U8.33 2839.21,1654.21 2855,1670 2895,1670 2915,1650 2915,1565 2938.76,1541.24 3000,1541.24 R2.2
GND: C1.1 C2.2 C3.2 C4.1 C5.1 C6.2 C7.2 C8.1 C9.1 C10.1 C11.1 C12.1 C13.1 C14.1 C15.1 C16.1 C17.1 C18.2 C19.2 C20.1 C21.1 C22.1 C23.1 C24.1 C25.1 C26.1 C27.1 C28.1 C29.2 C30.1 C31.2 C32.1 C33.1 C34.1 C35.1 C36.1 C37.2 C38.1 C39.2 C40.2 C41.2 CARD1.6 CARD1.10 CARD1.11 CARD1.12 CARD1.13 CN1.1 CN1.12 H1.4 H2.4 H3.4 H4.3 H5.3 H6.3 H7.4 K1.1 K2.1 K4.2 LED4.1 LED5.1 module1.2 Q1.2 R1.2 R3.2 R9.2 R10.2 R17.1 R21.3 R22.1 R23.1 U1.11 U1.18 U1.20 U2.12 U2.18 U2.31 U2.47 U2.63 U3.5 U4.1 U5.4 U6.1 U7.1 U8.8 U8.23 U8.35 U8.47 U9.1 U10.2 X2.2 X2.4 X3.2 X3.4 | length 21.2
  Top Layer w10: 2760.51,2629.02 2775.98,2629.02 2780,2625
  other v1: 2675,1065 2745,1065 2815,1065 2675,1135 2745,1135 2815,1135 2995,1155 2195,1160 2265,1160 2335,1160 3410,1160 3480,1160 3550,1160 2195,1230 2265,1230 2335,1230 3410,1230 3480,1230 3550,1230 2195,1300 2265,1300 2335,1300 2915,1345 3005,1345 3280,1360 3350,1360 3420,1360 3490,1360 3560,1360 3630,1360 3700,1360 3770,1360 3840,1360 3910,1360 4020,1375 4090,1375 4160,1375 2950,1440 4020,1445 4090,1445 4160,1445 2105,1490 2175,1490 2245,1490 4020,1515 4090,1515 4160,1515 2107.57,1560 2175,1560 2245,1560 2960,1625 3025,1625 2105,1630 2175,1630 2245,1630 2735,1770 2805,1770 2735,1840 2805,1840 2420,1880 2490,1880 2420,1950 2490,1950 2610,2000 3550,2025 3620,2025 3690,2025 3760,2025 3830,2025 3550,2095 3620,2095 3690,2095 3760,2095 3830,2095 2360,2120 2430,2120 3110,2120 3550,2165 3620,2165 3690,2165 3760,2165 3830,2165 2360,2190 2430,2190 2905,2210 2700,2225 3115,2225 3550,2235 3620,2235 3760,2235 3830,2235 2090,2280 2160,2280 3115,2285 3005,2290 3550,2305 3620,2305 3760,2305 3830,2305 2090,2350 2160,2350 3550,2375 3620,2375 3760,2375 3830,2375 3550,2445 3620,2445 3690,2445 3760,2445 3830,2445 3550,2515 3620,2515 3760,2515 3830,2515 3160,2530 2875,2560 3125,2570 3195,2570 3550,2585 3620,2585 3690,2585 3760,2585 3830,2585 2900,2600 3160,2605 3125,2640 3195,2640 2970,2655 3550,2655 3620,2655 3690,2655 3760,2655 3830,2655 2905,2675 2970,2705 3125,2710 3195,2710 2970,2755 2840,2765 2905,2765 3125,2780 3195,2780 3125,2850 3195,2850 2965,2855 2350,2910 2420,2910 3125,2920 3195,2920 2965,2935 2670,2955 2350,2980 2420,2980 2720,2980 2025,3010 2095,3010 2165,3010 2965,3010 2670,3035 2590,3045 2350,3050 2420,3050 2840,3050 2720,3075 2025,3080 2095,3080 2165,3080 2965,3080 2880,3090 2535,3110 2835,3115 2350,3120 2420,3120 2665,3120 2880,3145 2025,3150 2095,3150 2165,3150 2595,3165 2720,3165 2350,3190 2420,3190 2635,3200 2025,3220 2095,3220 2165,3220 2505.66,3225.5 3490,3240 3560,3240 3630,3240 3700,3240 3770,3240 3840,3240 3910,3240 3980,3240 4050,3240 4120,3240 2350,3260 2420,3260 2555,3275 2660,3280 2025,3290 2095,3290 2165,3290 3210,3290 3490,3310 3560,3310 3630,3310 3700,3310 3770,3310 3840,3310 3910,3310 3980,3310 4050,3310 4120,3310 2350,3330 2420,3330 2025,3360 2095,3360 2165,3360 3210,3365 3490,3380 3560,3380 3630,3380 3700,3380 3770,3380 3840,3380 3910,3380 3980,3380 4050,3380 4120,3380 2350,3400 2420,3400 2840,3425 2025,3430 2095,3430 2165,3430 3980,3440 4050,3440 4120,3440 2915,3445 2985,3445 3055,3445 2025,3500 2095,3500 2165,3500 3980,3510 4050,3510 4120,3510 2915,3515 2985,3515 3055,3515 2800,3525 2025,3570 2095,3570 2165,3570 3980,3580 4050,3580 4120,3580 2915,3585 2985,3585 3055,3585 2820,3590 3565,3605 2935,3675 3825,3675 3010,3680 3565,3680 3355,3695 2810,3700
I2C1_SCL: R4.1 U2.61 U3.3 | length 2225.8
  Top Layer w6: U3.3 1628.15,3792.48 R4.1
  Top Layer w10: R4.1 1807.48,3792.48 1825,3810 v1(1825,3905) ; U2.61 3156.72,3653.93 3298.93,3653.93 v1(3300,3655)
  Bottom Layer w10: v1(1825,3905) 2605,3905 2655,3955 2735,3955 2755,3935 2755,3830 2773.09,3811.91 3275.72,3811.91 3283.81,3803.81 3286.19,3803.81 3320,3770 3320,3675 v1(3300,3655)
I2C1_SDA: R5.1 U2.62 U3.4 | length 2058.4
  Top Layer w10: U3.4 1626.89,3877.52 R5.1 1681.24,3878.76 1768.76,3878.76 v1(1770,3880) ; U2.62 3156.72,3673.62 3273.62,3673.62 v1(3275,3675)
  Bottom Layer w10: v1(1770,3880) 2610,3880 2669,3939 2721,3939 2735,3925 2735,3815 2760,3790 3275,3790 3300,3765 3300,3700 v1(3275,3675)
I2C2_SCL: module1.10 U2.29 | length 1741.7
  Top Layer w10: U2.29 2596.21,3476.42 2430,3642.63 2430,4627.37 2522.63,4720 2700,4720 module1.10
I2C2_SDA: module1.12 U2.30 | length 1589.6
  Top Layer w10: module1.12 2414,4634 2414,3636 2593.27,3456.73 U2.30
KEY1: C19.1 K2.2 U2.45 | length 2872.3
  Top Layer w10: K2.2@1536.41,1747.33 1713.59,1747.33 1719.49,1747.33 1729.34,1737.48 C19.1 1782.95,1737.48 1793.7,1748.23 1793.7,1751.18 1835,1792.48 1835,2210 2060,2435 2160,2435 v1(2200,2475) ; v1(2345.84,2475) 2965,2475 3021,2531 3021,3209.08 3018.58,3211.5 U2.45
  Bottom Layer w10: v1(2200,2475) v1(2345.84,2475)
KEY2: C18.1 K1.2 U2.44 | length 3104.6
  Top Layer w10: K1.2@1536.41,1492.33 1713.59,1492.33 1770.16,1492.33 C18.1 1782.95,1482.48 1793.7,1493.23 1793.7,1496.18 1860,1562.48 1860,2195 2084,2419 2184,2419 2225,2460 v1(2225,2500) ; v1(2360,2500) 2960,2500 3005,2545 3005,3202.46 2998.9,3208.56 U2.44
  Bottom Layer w10: v1(2225,2500) v1(2360,2500)
LCD_CS: module1.3 U2.20 | length 2062
  Top Layer w10: U2.20 2636.42,3653.58 2576,3714 2576,3741.51 2575.3,3742.22 2575.3,4552.67 2621.63,4599 3399,4599 3475,4675 module1.3
LCD_DC: module1.5 U2.25 | length 2081.5
  Top Layer w10: U2.25 2621.7,3555.16 2496,3680.86 2496,3708.38 2495.3,3709.08 2495.3,4595.3 2600.84,4700.84 2844.16,4700.84 v1(2845,4700) ; v1(3255,4700) 3275,4720 module1.5
  Bottom Layer w10: v1(2845,4700) v1(3255,4700)
LCD_LED: module1.8 U2.24 | length 1750.4
  Top Layer w10: U2.24 2624.65,3574.84 2512,3687.49 2512,3715 2511.3,3715.71 2511.3,4588.67 2597.63,4675 v1(2820,4675) ; v1(2960,4675) 2960,4677.62 2975,4692.62 module1.8
  Bottom Layer w10: v1(2820,4675) v1(2960,4675)
LCD_RST: module1.4 module1.11 U2.26 | length 2247.1
  Top Layer w10: v1(2505,4635) 2479.3,4609.3 2479.3,3702.45 2480,3701.75 2480,3674.24 2618.77,3535.47 U2.26
  Bottom Layer w10: v1(2505,4635) 2507.62,4635 2667.62,4795 module1.11 2745,4865 3305,4865 module1.4
LED_B: R8.2 U2.59 | length 2095.4
  Top Layer w10: U2.59 3395.79,3614.21 3500,3510 3780,3510 3930,3660 v1(3930,3760) ; v1(3930,4150) 3930,4540 4000,4610 R8.2
  Bottom Layer w10: v1(3930,3760) v1(3930,4150)
LED_G: R7.2 U2.58 | length 2064.4
  Top Layer w10: U2.58 3375.47,3594.53 3485,3485 3784.5,3485 3955,3655.5 v1(3955,3735) ; v1(3955,4120) 3955,4500 4010,4555 R7.2
  Bottom Layer w10: v1(3955,3735) v1(3955,4120)
LED_R: R6.1 U2.56 | length 2054.5
  Top Layer w10: U2.56 3230.16,3555.16 3250,3575 3355,3575 3470,3460 3794.85,3460 3980.68,3645.83 3980.68,3759.32 v1(3980,3760) ; v1(3980,4150) 3980,4475 4005,4500 R6.1
  Bottom Layer w10: v1(3980,3760) v1(3980,4150)
MPU6500_CS: U1.22 U2.37 | length 799.8
  Top Layer w6: U1.22 2816.86,2692.87 2820.37,2696.38 2820.37,2782.36 2833.01,2795 2905,2795 2925,2815 2925,3165 2861.1,3228.9 U2.37
MPU6500_INT: U1.12 U2.38 | length 1187.9
  Top Layer w6: U1.12 2663.8,2546.2 2685,2525 2885,2525 2937,2577 2937,3175.63 2880.79,3231.84 U2.38
NetBUZZER1_2: BUZZER1.2 D1.1 Q1.3 | length 643.4
  Top Layer w10: Q1.3 4273.36,1878.18 BUZZER1.2 4238.27,1920 4244.99,1920 4370.94,2045.94 D1.1
NetC41_1: C41.1 U1.10 | length 122.2
  Top Layer w6: C41.1 2544.61,2677.13 U1.10
NetCN1_2: CN1.2 CN1.11 F1.1 | length 426.1
  Top Layer w10: F1.1 2621.78,1329.53 2660.51,1290.79 CN1.2 2666.34,1242.68 2666.34,1218.66 2695,1190 2820,1190 2843.67,1213.67 2843.67,1242.68 CN1.11
NetCN1_4: CN1.4 R3.1 | length 124.3
  Top Layer w10: R3.1 2705.8,1371.72 CN1.4
NetCN1_10: CN1.10 R1.1 | length 124.5
  Top Layer w10: CN1.10 2823.91,1264.25 2825,1265.35 R1.1
NetD2_1: D2.1 U10.1 | length 143.9
  Top Layer w6: U10.1 3700.94,2984.52 D2.1
NetLED1_1: LED1.1 R6.2 | length 128.1
  Top Layer w10: R6.2 4307.35,4504.87 LED1.1
NetLED2_1: LED2.1 R7.1 | length 133.9
  Top Layer w10: R7.1 4302.48,4557.95 4314.39,4569.87 LED2.1
NetLED3_1: LED3.1 R8.1 | length 138.1
  Top Layer w10: R8.1 4302.48,4612.95 4324.39,4634.87 LED3.1
NetLED4_2: LED4.2 R12.1 | length 61.1
  Top Layer w10: LED4.2 2419.86,1177.38 R12.1
NetLED5_2: LED5.2 R13.1 | length 61.1
  Top Layer w10: LED5.2 3064.86,1177.38 R13.1
NetQ1_1: Q1.1 R14.2 | length 108.8
  Top Layer w10: R14.2 4082.56,1809.96 4184.08,1809.96 Q1.1
NRST: C31.1 K4.1 R11.2 U2.7 U8.16 | length 4528.2
  Top Layer w10: K4.1@1516.41,4557.32 1693.59,4557.32 1760.16,4557.32 C31.1 1827.95,4552.48 1874.16,4506.28 v1(1874.16,3705) ; v1(2284.16,1860) v1(2284.16,3660) ; v1(2400,1825) 2400.67,1824.33 2622.56,1824.33 U8.16 ; v1(2780,3660) 2865.84,3660 2959.18,3753.34 2959.18,3791.02 U2.7
  Bottom Layer w10: v1(1874.16,3705) 1919.16,3660 v1(2780,3660) ; v1(2284.16,1860) 2285,1859.16 2285,1835 2295,1825 v1(2400,1825)
OSC32_IN: C17.2 U2.3 X1.2 | length 376.4
  Top Layer w10: U2.3 3038.27,3938.27 3119.53,4019.53 3119.53,4034.33 X1.2 3135,4050.2 C17.2
OSC32_OUT: C16.2 U2.4 X1.1 | length 343
  Top Layer w10: U2.4 3018.58,3973.58 3034.8,3989.8 X1.1 3035,4050.2 C16.2
OSC_IN: C30.2 U2.5 X2.3 | length 502.8
  Top Layer w10: X2.3@2921.06,4111.93 2885,4075.87 2885,4000 2902.5,3982.5 2972.5,3982.5 2998.9,3956.1 U2.5 ; C30.2 2922.48,4114.45 X2.3
OSC_OUT: C29.1 U2.6 X2.1 | length 445.3
  Top Layer w10: C29.1 2752.48,4045 X2.1 2838.39,4001.61 2875,3965 2950,3965 2979.21,3935.79 U2.6
PHOTODIODE: R19.1 U2.10 U9.2 | length 2944.6
  Top Layer w10: U2.10 2900.47,3895.47 v1(2920,3915) ; v1(3520,3810) 3990,3810 4205,3595 4205,2500 4250,2455 4377.48,2455 4400.75,2431.73 4403.7,2431.73 4412.48,2422.95 R19.1 U9.2
  Bottom Layer w10: v1(2920,3915) 3415,3915 v1(3520,3810)
RES_ADJ: R21.2 U2.8 | length 2138.4
  Top Layer w10: U2.8 2939.84,3847.22 2950,3857.38 v1(2950,3860) ; v1(3395,3860) 4010,3860 4365,3505 4365,3093.43 R21.2
  Bottom Layer w10: v1(2950,3860) v1(3395,3860)
RES_NTC: R20.1 R23.2 U2.9 | length 2682.3
  Top Layer w10: U2.9 2920.16,3870.16 v1(2940,3890) ; v1(3460,3835) 4000,3835 4235,3600 4235,2705 4270,2670 4372.48,2670 4400.75,2641.73 4403.7,2641.73 4412.48,2632.95 R20.1 R23.2
  Bottom Layer w10: v1(2940,3890) 3405,3890 v1(3460,3835)
SDIO_CLK: CARD1.5 U2.53 | length 2190.2
  Top Layer w10: U2.53 3323.48,3496.1 3327.38,3500 v1(3330,3500) ; v1(3330,3435) 3330,1740 3435.36,1634.64 CARD1.5
  Bottom Layer w10: v1(3330,3435) v1(3330,3500)
SDIO_CMD: CARD1.3 R28.2 U2.54 | length 2669.2
  Top Layer w10: U2.54 3261.95,3515.79 3267.01,3520.84 3351.54,3520.84 3357.38,3515 v1(3360,3515) ; v1(3360,3435) 3360,1750 3521.97,1588.03 CARD1.3 3520.99,1527.67 3520.99,1476.83 v1(3520,1475.84) ; v1(3610,1755) R28.2
  Bottom Layer w10: v1(3360,3435) v1(3360,3515) ; v1(3520,1475.84) 3520,1635 3610,1725 v1(3610,1755)
SDIO_D0: CARD1.7 R27.2 U2.39 | length 2782.7
  Top Layer w10: U2.39 2900.47,3247.15 2916.05,3231.57 v1(2916.05,3231.05) ; v1(3305,3200) 3305,1725 3348.74,1681.26 3348.74,1540 3349.37,1539.37 3349.37,1465.63 v1(3350,1465) ; v1(3555,1760) R27.2
  Bottom Layer w10: v1(2916.05,3231.05) 2916.05,3228.95 2945,3200 v1(3305,3200) ; v1(3350,1465) 3350,1685 3365,1700 3535,1700 3555,1720 v1(3555,1760)
SDIO_D1: CARD1.8 R29.2 U2.40 | length 2711.9
  Top Layer w10: U2.40 2920.16,3272.46 2935,3257.62 v1(2935,3255) ; v1(3285,3225) 3284.16,3224.16 3284.16,1705.84 3305.44,1684.56 3305.44,1540 3305.22,1539.78 3305.22,1465.22 v1(3305,1465) ; v1(3500,1760) R29.2
  Bottom Layer w10: v1(2935,3255) 2965,3225 v1(3285,3225) ; v1(3305,1465) 3305,1705 3325,1725 3465,1725 v1(3500,1760)
SDIO_D2: CARD1.1 R25.2 U2.51 | length 2680.3
  Top Layer w10: U2.51 3403.27,3456.73 3415,3445 3415,1770 3599.81,1585.19 3599.81,1537.44 CARD1.1 3608.59,1481.21 3605,1477.62 v1(3605,1475) ; v1(3720,1755) R25.2
  Bottom Layer w10: v1(3605,1475) 3605,1615 3720,1730 v1(3720,1755)
SDIO_D3: CARD1.2 R26.2 U2.52 | length 2671.9
  Top Layer w10: U2.52 3388.85,3476.42 v1(3390,3477.57) ; v1(3385.68,3435) 3385.68,1759.32 3565.28,1579.72 CARD1.2 3565.14,1528.52 3565.14,1475.14 v1(3565,1475) ; v1(3665,1755) R26.2
  Bottom Layer w10: v1(3385.68,3435) 3385.68,3437.62 3390,3441.94 v1(3390,3477.57) ; v1(3565,1475) 3565,1630 3665,1730 v1(3665,1755)
SPI1_CLK: module1.7 U2.21 | length 1695.3
  Top Layer w10: U2.21 2633.47,3633.9 2560,3707.37 2560,3734.89 2559.3,3735.59 2559.3,4559.3 2615,4615 2990,4615 3075,4700 module1.7
SPI1_MISO: module1.9 U2.22 | length 1566.1
  Top Layer w10: U2.22 2630.54,3614.21 2544,3700.75 2544,3728.26 2543.3,3728.96 2543.3,4575 2601.61,4633.31 2838.32,4633.31 2875,4670 module1.9
SPI1_MOSI: module1.6 U2.23 | length 1903.9
  Top Layer w10: U2.23 2627.59,3594.53 2528,3694.12 2528,3721.63 2527.3,3722.33 2527.3,4582.04 2601.1,4655.84 2793.32,4655.84 v1(2795,4654.16) ; v1(3160,4675) 3160,4677.62 3175,4692.62 module1.6
  Bottom Layer w10: v1(2795,4654.16) 3139.16,4654.16 v1(3160,4675)
SPI2_CLK: U1.23 U2.34 U5.6 | length 1098.5
  Top Layer w6: U5.6 2650,2930 2805,2775 2805,2712.13 2801.49,2708.62 U1.23
  Top Layer w10: U5.6 2524.13,2930 2500.73,2953.4 2500.73,3150.73 2581,3231 2781,3231 2802.05,3252.05 U2.34
SPI2_CS: U2.33 U5.1 | length 565
  Top Layer w10: v1(2780,3190) 2780,3154.87 2762.69,3137.56 2762.69,2869.4 2802.09,2830 U5.1 ; v1(2780,3265) 2780,3267.62 2782.36,3269.98 U2.33
  Bottom Layer w10: v1(2780,3190) v1(2780,3265)
SPI2_MISO: U1.9 U2.35 U5.2 | length 1078
  Top Layer w6: v1(2580,2695.97) 2582.17,2693.81 2662.86,2693.81 U1.9
  Top Layer w10: v1(2820,3190) 2820,3170 2778.69,3128.69 2778.69,2903.4 2802.09,2880 v1(2890,2880) ; U2.35 2822.08,3338.28 2822.08,3265.82 v1(2822.89,3265)
  Bottom Layer w10: v1(2580,2695.97) 2580,2750 2710,2880 v1(2890,2880) ; v1(2820,3190) 2821.45,3191.45 2821.45,3263.55 v1(2822.89,3265)
SPI2_MOSI: U1.24 U2.36 U5.5 | length 922.4
  Top Layer w6: v1(2625,2900) 2655,2900 2776.2,2778.8 U1.24
  Top Layer w10: U5.5 v1(2625,2980) 2625,3135 2705,3215 2820,3215 2843.74,3238.74 2843.74,3279.19 2841.42,3281.51 U2.36
  Bottom Layer w10: v1(2625,2900) v1(2625,2980)
SWCLK: H1.3 U2.49 U8.14 | length 2174.3
  Top Layer w10: v1(2565,1915) 2565,1875 2576.42,1863.58 U8.14 ; v1(2565,1970) 2565,2233.05 2578.48,2246.52 ; v1(2595,2235) 2592.38,2235 2580.86,2246.52 2578.48,2246.52 ; U2.49 3156.37,3060 3060,2963.63 3060,2455 2865,2260 2591.95,2260 2578.48,2246.52
  Bottom Layer w10: v1(2565,1915) v1(2565,1970) ; H1.3 2575,2255 v1(2595,2235)
SWDIO: H1.2 U2.46 U8.12 | length 1987.2
  Top Layer w10: H1.2 2675,2285 ; U8.12 2557.68,1942.32 2535,1965 2535,2245 2575,2285 2675,2285 ; U2.46 3038.27,2468.27 2855,2285 2675,2285
TF_CD: CARD1.CD U2.55 | length 2173.7
  Top Layer w10: U2.55 3234.09,3535.47 3243.62,3545 v1(3290,3545) ; CARD1.CD 3262.13,3237.13 3300,3275 v1(3300,3435)
  Bottom Layer w10: v1(3290,3545) 3290,3542.38 3300,3532.38 v1(3300,3435)
TP_INT: module1.14 U2.27 | length 1466.8
  Top Layer w10: v1(2460,4625) 2460,3671.61 2615.82,3515.79 U2.27
  Bottom Layer w10: module1.14 2375,4710 v1(2460,4625)
UART1_RX: H2.2 U2.43 | length 3124.4
  Top Layer w10: U2.43 2979.21,3225.39 2980.84,3223.76 2980.84,3140.84 v1(2980,3140) ; v1(4005,3120) 4005,3117.38 4020,3102.38 4020,1745 4185,1580 4370,1580 H2.2
  Bottom Layer w10: v1(2980,3140) 3985,3140 v1(4005,3120)
UART1_TX: H2.3 U2.42 | length 3088.2
  Top Layer w10: U2.42 2959.76,3338.39 2959.76,3170.24 v1(2960,3170) ; v1(4020,3145) 4045,3120 4045,1755 4186.57,1613.43 H2.3
  Bottom Layer w10: v1(2960,3170) 3995,3170 v1(4020,3145)
UART2_RX: R15.2 U2.17 | length 1449.5
  Top Layer w10: v1(2365,3710) 2325,3670 2325,2715.86 2330.86,2710 2380,2710 2390,2700 R15.2 ; v1(2640,3712.64) U2.17
  Bottom Layer w10: v1(2365,3710) 2366.32,3711.32 2638.68,3711.32 v1(2640,3712.64)
UART2_TX: R16.2 U2.16 | length 1573
  Top Layer w10: R16.2 2322.05,2672.48 2313.27,2681.26 2313.27,2684.21 2305,2692.48 2305,3700 v1(2345,3740) ; v1(2690,3739.16) 2690.84,3740 2764.45,3740 2782.36,3757.91 U2.16
  Bottom Layer w10: v1(2345,3740) 2345.42,3739.58 2689.58,3739.58 v1(2690,3739.16)
VBAT: D2.2 D3.2 U2.1 | length 1382.9
  Top Layer w6: U2.1 U2.1@3077.64,3819.15 ; v1(3110,3835) 3109.68,3835 3096.52,3821.83 3080.32,3821.83 U2.1@3077.64,3819.15 ; D3.2 3125.94,3885 3095,3885 3077.64,3867.64 U2.1@3077.64,3819.15 ; v1(3440,3450) 3440,3130 3450,3120 D2.2
  Bottom Layer w6: v1(3110,3835) 3420,3835 3440,3815 v1(3440,3450)
pads on no net: BUZZER1.3 BUZZER1.4 CN1.3 CN1.9 CN1.13 CN1.14 module1.13 U1.1 U1.2 U1.3 U1.4 U1.5 U1.6 U1.7 U1.14 U1.15 U1.16 U1.17 U1.19 U1.21 U1.25 U2.2 U2.41 U2.57 U3.1 U3.6 U8.2 U8.3 U8.4 U8.10 U8.11 U8.13 U8.15 U8.17 U8.18 U8.19 U8.21 U8.22 U8.26 U8.27 U8.28 U8.29 U8.38 U8.39 U8.40 U8.41 U8.42 U8.43 U8.46

## Polygon pours and split planes (outlines as drawn)
GND on Bottom Layer "GND_L02_P001" (solid, remove dead copper, pour order 1): 1435.25,1093.99 ccw(c1513.99,1093.99) 1513.99,1015.25 4506.12,1015.25 ccw(c4506.12,1093.99) 4584.86,1093.99 4584.86,4873.52 ccw(c4506.12,4873.52) 4506.12,4952.26 1513.99,4952.26 ccw(c1513.99,4873.52) 1435.25,4873.52
GND on Top Layer "GND_L01_P000" (solid, remove dead copper, pour order 0): 1435.25,1093.99 ccw(c1513.99,1093.99) 1513.99,1015.25 4506.12,1015.25 ccw(c4506.12,1093.99) 4584.86,1093.99 4584.86,4873.52 ccw(c4506.12,4873.52) 4506.12,4952.26 1513.99,4952.26 ccw(c1513.99,4873.52) 1435.25,4873.52

## Silkscreen, mask and mechanical layers (free items; w line width, h text height)
Top Overlay:
  lines w5.98: 1570,2130 1680,2130 ; 1605,2170 1605,2050 ; 1605,2050 1615,2070 1595,2070 1605,2050 ; 1680,2130 1660,2120 1660,2140 1680,2130
  lines w10: 4435,2380 4570,2380 4570,2465 4435,2465 4435,2380 ; 4440,2595 4440,2670 4565,2670 4565,2595 4440,2595
  text "B" at 4520,4597.5 h70
  text "NRST" at 1500,4590 h70
  text "G" at 4520,4535 h70
  text "R" at 4520,4472.5 h70
  text "GND" at 4150,4330 h65
  text "ADC0" at 4150,4190 h65
  text "BOOT" at 1495,4125 h70
  text "3V3" at 4150,4050 h65
  text "GND" at 4155,3880 h65
  text "ADC1" at 4155,3742.83 h65
  text "3V3" at 4155,3605 h65
  text "GND" at 4153.65,3435 h65
  text "ADC13" at 4153.65,3297.83 h65
  text "3V3" at 4153.65,3175 h65
  text "SESAME" at 1635,2890 h120 r90
  text "V1.2" at 1755,2890 h120 r90
  text "5V" at 2140,2865 h70
  text "ADJ" at 4270,2775 h70 r90
  text "TX" at 2140,2766.67 h70
  text "RX" at 2140,2668.75 h70
  text "DAP" at 2040,2570 h70 r90
  text "GND" at 2140,2570 h70
  text "NTC" at 4432.5,2530 h70
  text "MCU" at 2660,2420 h70
  text "PHD" at 4432.5,2315 h65
  text "CLK" at 3020.11,2312.5 h70 r90
  text "GND" at 2920,2312.5 h70 r90
  text "DIO" at 3120.21,2312.5 h70 r90
  text "5V" at 3220,2312.5 h70 r90
  text "Y" at 1653.06,2147.22 h40
  text "X" at 1628.12,2047.22 h40
  text "5V" at 3200,1840 h70
  text "KEY1" at 1525,1785 h70
  text "DIO" at 3200,1750.21 h70
  text "CLK" at 3200,1660.11 h70
  text "GND" at 4190,1595 h70
  text "GND" at 3200,1570 h70
  text "DAP" at 3450,1570 h70 r90
  text "KEY2" at 1525,1525 h70
  text "TX1" at 4190,1496.45 h70
  text "RX1" at 4190,1398.24 h70
  text "5V" at 4190,1300 h70
Mechanical 1:
  circle w10: c4474.62,4814.46 r62.99
  circle w10: c1545.49,1153.05 r62.99
  circle w10: c4474.62,1153.05 r62.99
  circle w10: c1545.49,4814.46 r62.99
  lines w10: 1435.25,1093.99 ccw(c1513.99,1093.99) 1513.99,1015.25 4506.12,1015.25 ccw(c4506.12,1093.99) 4584.86,1093.99 4584.86,4873.52 ccw(c4506.12,4873.52) 4506.12,4952.26 1513.99,4952.26 ccw(c1513.99,4873.52) 1435.25,4873.52 1435.25,1093.99

## Text inside footprints (layer, text, board x,y; h text height)
BUZZER1: Top Overlay "+" at 4281.56,2094.36 h80